# Altium PCB EE579_Skittles_pcb.PcbDoc
Units mm, origin at the board's own origin, x right, y up, seen from the top; angles counter-clockwise.
Board outline 58 x 50 mm, 2 copper layers (Top Layer, Bottom Layer), stack 1.57 mm thick; 33 components, 33 nets, 117 pads, 56 vias.
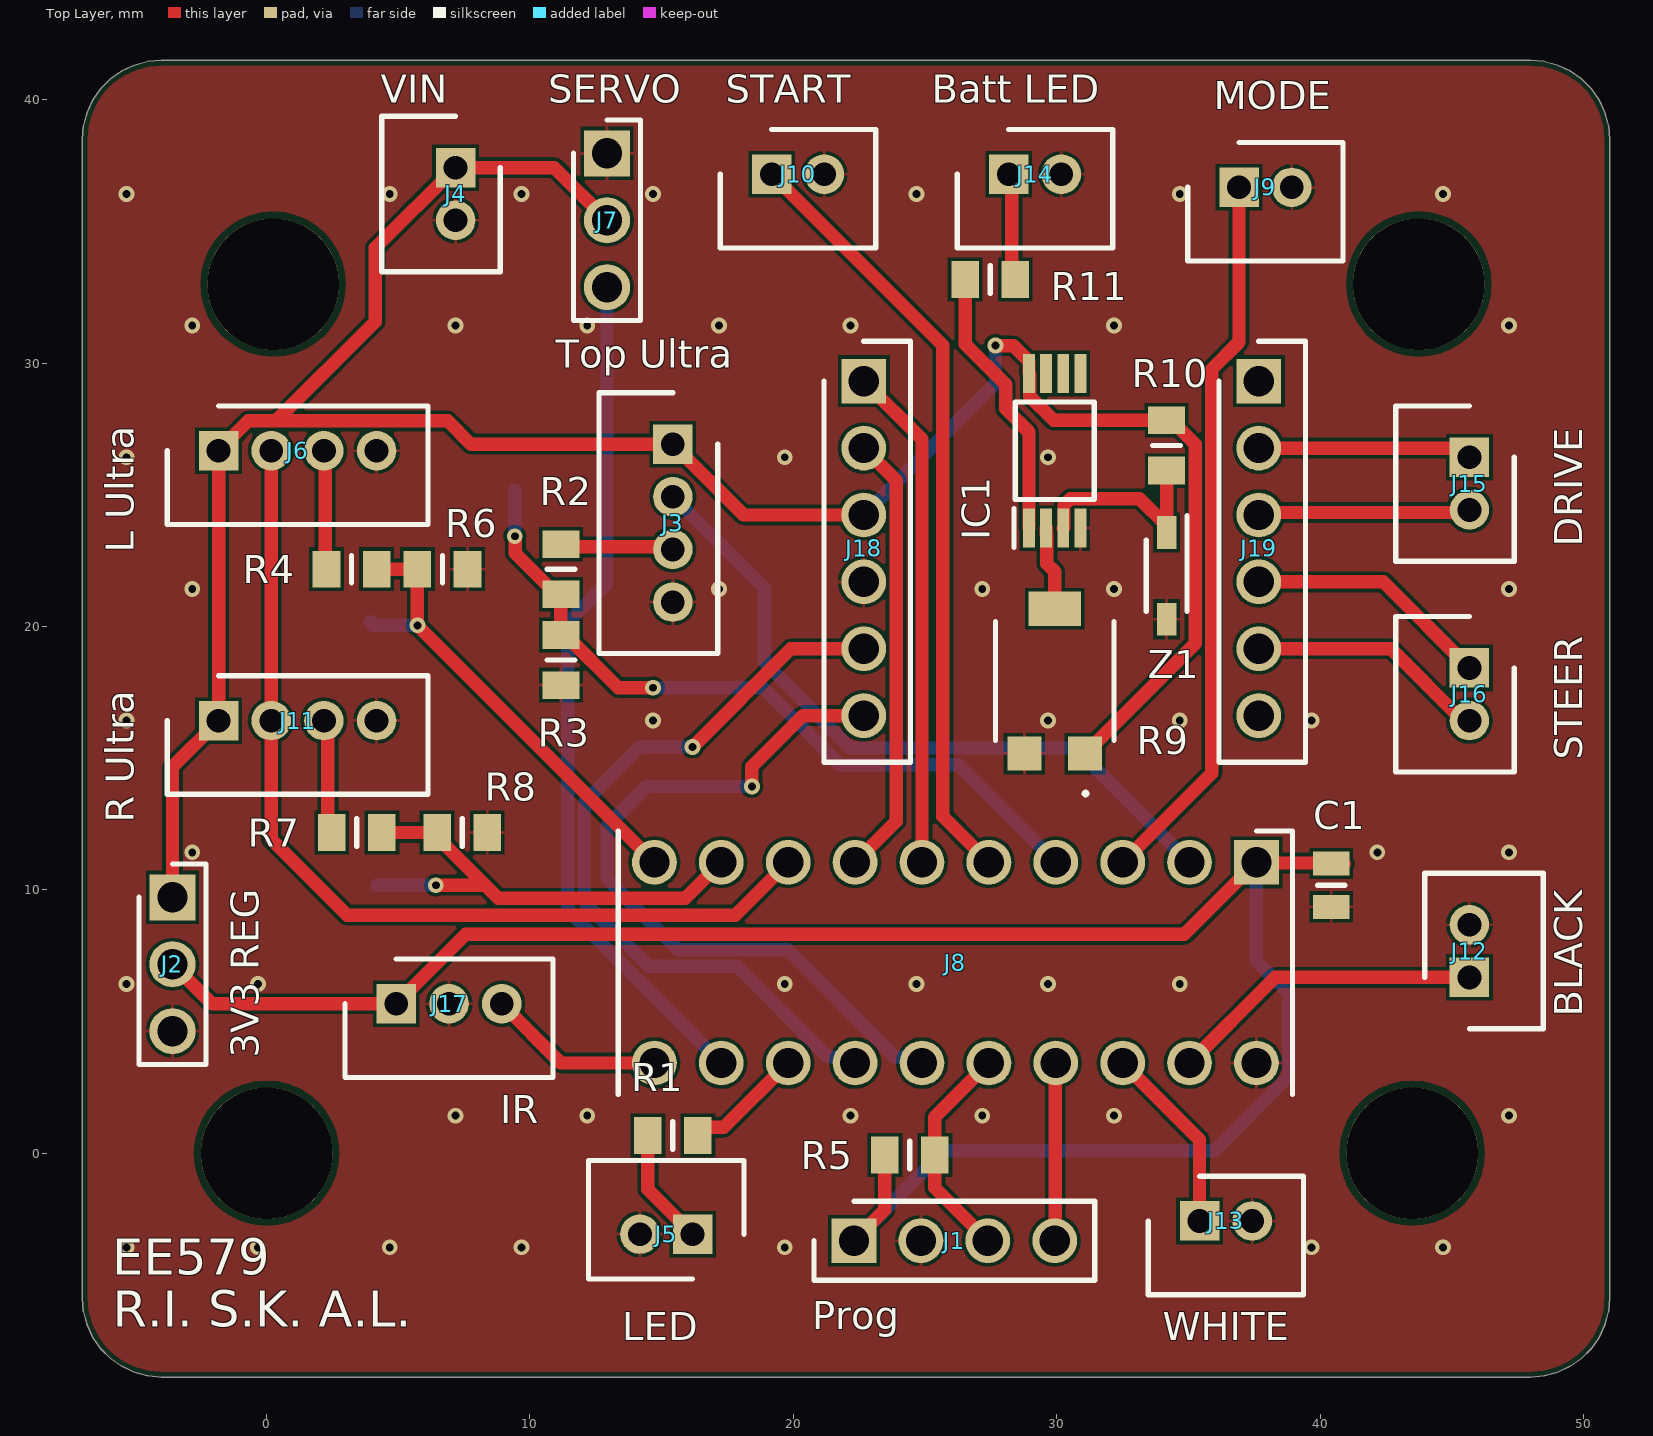
[diagram p0: Top Layer view]
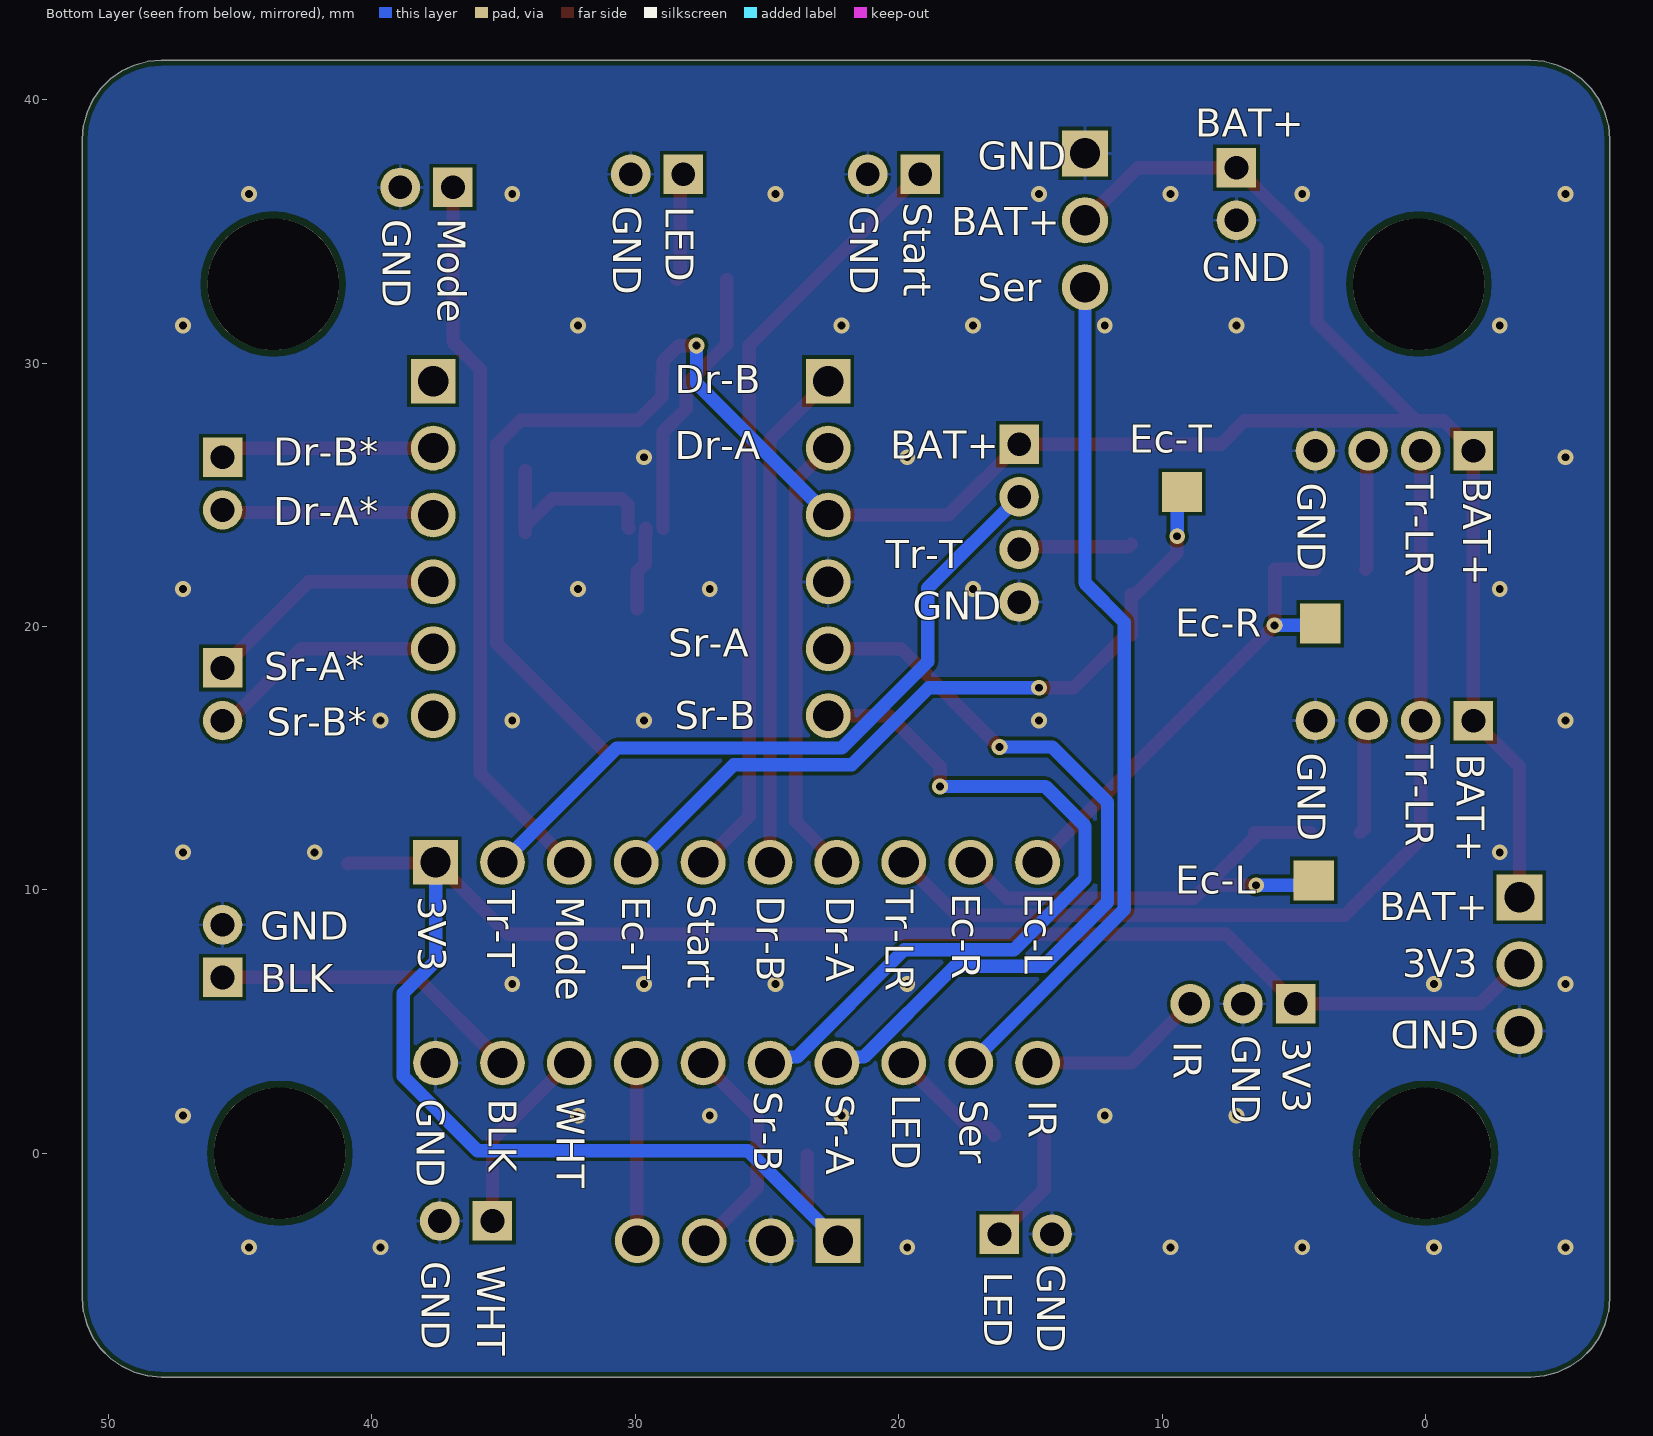
[diagram p1: Bottom Layer view, seen from below]
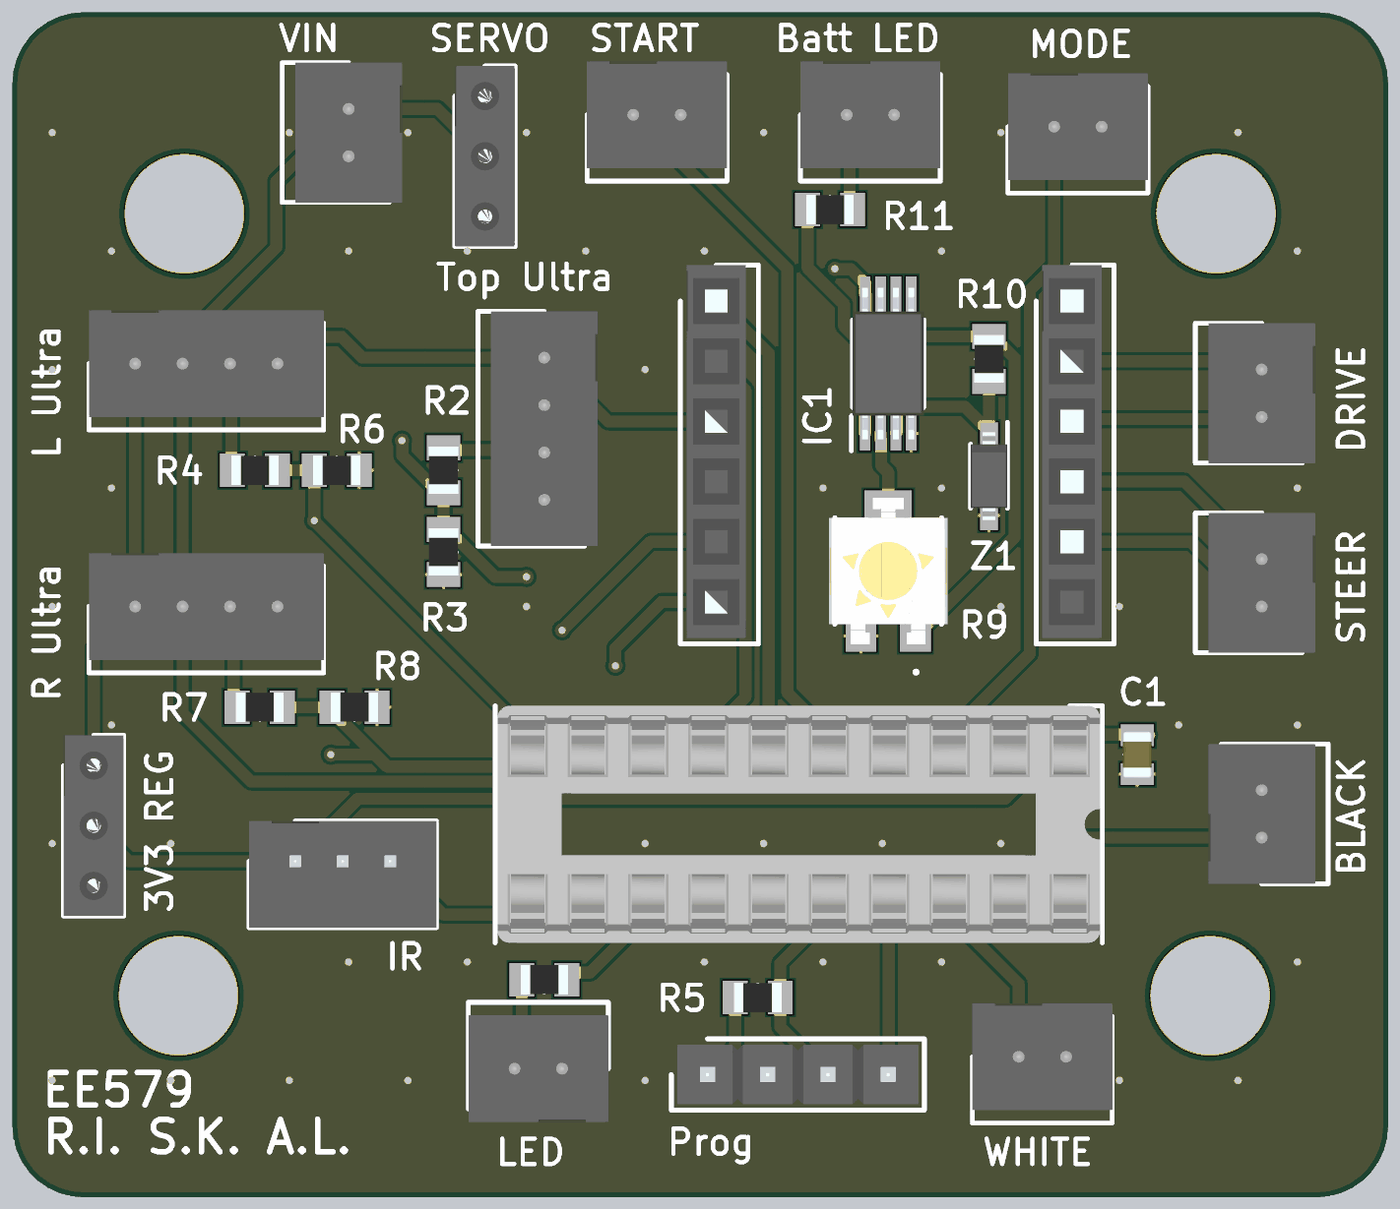
[diagram p2: 3D render of the assembled board from above, using the file's embedded part models]

## Layer stack, top to bottom
Top Solder: solder mask 0.0127, Solder Resist, Dk 3.8
Top Layer: signal copper 0.035
Dielectric: core 1.5, FR-4, Dk 4.5
Bottom Layer: signal copper 0.035
Bottom Solder: solder mask 0.0127, Solder Resist, Dk 3.8

## Board outline
48,-8.501 48.521,-8.455 49.026,-8.32 49.5,-8.099 49.928,-7.799 50.298,-7.429 50.598,-7.001 50.819,-6.527 50.954,-6.022 51,-5.501 51,38.499 50.954,39.02 50.819,39.525 50.598,39.999 50.298,40.427 49.928,40.797 49.5,41.097 49.026,41.318 48.521,41.453 48,41.499 -4,41.499 -4.521,41.453 -5.026,41.318 -5.5,41.097 -5.928,40.797 -6.298,40.427 -6.598,39.999 -6.819,39.525 -6.954,39.02 -7,38.499 -7,-5.501 -6.954,-6.022 -6.819,-6.527 -6.598,-7.001 -6.298,-7.429 -5.928,-7.799 -5.5,-8.099 -5.026,-8.32 -4.521,-8.455 -4,-8.501

## Design rules (kind name [scope] priority, off if disabled: settings)
BoardOutlineClearance [All] p1: gap=0.2 ignorepadtopadclearanceinfootprint=FALSE
Clearance [All] p1: gap=0.127 ignorepadtopadclearanceinfootprint=FALSE except(0.25: Arc-Hole Track-Hole SMDPad-Hole THPad-Hole Via-Hole Fill-Hole Poly-Hole Region-Hole Text-Hole)
ComponentClearance [All] p1: gap=0.127 collisioncheckmode=3 verticalgap=0.127 showdistances=TRUE
DiffPairsRouting [All] p1: maxlimit=0.254 minlimit=0.127 mostfreqgap=0.127 toplayer_minwidth=0.127 toplayer_maxwidth=25.4 toplayer_prefwidth=0.127 bottomlayer_minwidth=0.127 bottomlayer_maxwidth=25.4 bottomlayer_prefwidth=0.127 maxuncoupledlength=12.7
Height [All] p1: minheight=0 maxheight=1816.048 prefheight=12.7
HoleSize [All] p1: absolutevalues=TRUE maxlimit=6.3 minlimit=0.3 maxpercent=80.000 minpercent=20.000
HoleToHoleClearance [All] p1: gap=0.25 allowstackedmicrovias=FALSE
MinimumAnnularRing [All] p1: minimumring=0.076
MinimumSolderMaskSliver [All] p1: minsoldermaskwidth=0
PlaneClearance [All] p1: clearance=0.127
PlaneConnect PlaneConnectPowerPads [InPadClass('PowerPads')] p1: planeconnectstyle=Direct reliefexpansion=0.508 reliefentries=4 reliefconductorwidth=0.254 reliefairgap=0.254
PlaneConnect [All] p2: pad.planeconnectstyle=Relief pad.reliefexpansion=0.3 pad.reliefentries=4 pad.reliefconductorwidth=0.127 pad.reliefairgap=0.127 via.planeconnectstyle=Direct via.reliefexpansion=0.3 via.reliefentries=4 via.reliefconductorwidth=0.127 via.reliefairgap=0.127
PolygonConnect PolygonConnectPowerPads [All vs (InPadClass('PowerPads'))] p1: connectstyle=Direct reliefconductorwidth=0.254 reliefentries=4 polygonreliefangle="90 Angle" airgapwidth=0.254
PolygonConnect [All] p2: thpad.connectstyle=Relief thpad.reliefconductorwidth=0.127 thpad.reliefentries=4 thpad.polygonreliefangle="90 Angle" thpad.airgapwidth=0.127 smdpad.connectstyle=Relief smdpad.reliefconductorwidth=0.127 smdpad.reliefentries=4 smdpad.polygonreliefangle="90 Angle" smdpad.airgapwidth=0.127 via.connectstyle=Direct via.reliefconductorwidth=0.127 via.reliefentries=4 via.polygonreliefangle="90 Angle" via.airgapwidth=0.127
RoutingVias [All] p1: holewidth=0.3 width=0.6 viastyle="Through Hole" minholewidth=0.3 minwidth=0.6 maxholewidth=0.6 maxwidth=6.6
SilkToSilkClearance [All] p1: silktosilkclearance=0
SilkToSolderMaskClearance [IsPad] p1: minsilkscreentomaskgap=0.127 clearancetoexposedcopper=TRUE
SolderMaskExpansion [All] p1: expansion=0.075 istentingtop=FALSE
Width [All] p1: maxlimit=25.4 minlimit=0.127 preferedwidth=0.127 minimp=50.000000 maximp=50.000000 favimp=50.000000
20 further rules are at their usual default settings.

## Components (designator, comment, footprint, x,y, rotation, side; value= is the part's Value field where it differs from the comment)
C1 "21A106KQFNNNG" CAPC2012X135N 40.425,10.174 r90 top
IC1 "TS952IPT" SOP65P640X120-8N 29.925,26.674 r90 top
J1 "Prog" HDRV4W64P0X254_1X4_1016X250X901P 22.305,-3.326 r0 top
J2 "3V3 REG" RHDR3W60P0X254_1X3_762X254X700P -3.575,9.714 r270 top
J3 "Top Ultra" SHDR4W50P0X200_1X4_990X450X600P 15.425,26.924 r90 top
J4 "VIN" SHDR2W50P0X200_1X2_590X450X600P 7.175,37.424 r90 top
J5 "LED" SHDR2W50P0X200_1X2_590X450X600P 16.175,-3.076 r0 top
J6 "L Ultra" SHDR4W50P0X200_1X4_990X450X600P -1.825,26.674 r180 top
J7 "SERVO" RHDR3W60P0X254_1X3_762X254X700P 12.925,37.964 r270 top
J8 "MSP430G2553 IC Socket" DIPS762W70P254L2540H510Q20N 37.585,11.044 r270 top
J9 "START" SHDR2W50P0X200_1X2_590X450X600P 36.925,36.674 r180 top
J10 "MODE" SHDR2W50P0X200_1X2_590X450X600P 19.175,37.174 r180 top
J11 "R Ultra" SHDR4W50P0X200_1X4_990X450X600P -1.825,16.424 r180 top
J12 "BLACK" SHDR2W50P0X200_1X2_590X450X600P 45.675,6.674 r270 top
J13 "WHITE" SHDR2W50P0X200_1X2_590X450X600P 35.425,-2.576 r180 top
J14 "Batt LED" SHDR2W50P0X200_1X2_590X450X600P 28.175,37.174 r180 top
J15 "DRIVE" SHDR2W50P0X200_1X2_590X450X600P 45.675,26.424 r90 top
J16 "STEER" SHDR2W50P0X200_1X2_590X450X600P 45.675,18.424 r90 top
J17 "IR" SHDR3W50P0X200_1X3_790X450X600P 4.925,5.674 r180 top
J18 "61300611821" RHDR6W97P0X254_1X6_1574X250X865P 22.675,29.314 r270 top
J19 "61300611821" RHDR6W97P0X254_1X6_1574X250X865P 37.675,29.314 r270 top
R1 "ERJ-PB6B3002V" RESC2012X70N 15.425,0.674 r180 top
R2 "ERJ-PB6B3002V" RESC2012X70N 11.175,22.174 r90 top
R3 "ERJ-PB6B3002V" RESC2012X70N 11.175,18.724 r90 top
R4 "ERJ-PB6B3002V" RESC2012X70N 3.225,22.174 r180 top
R5 "ERJ-PB6B3002V" RESC2012X70N 24.425,-0.076 r180 top
R6 "ERJ-PB6B3002V" RESC2012X70N 6.675,22.174 r180 top
R7 "ERJ-PB6B3002V" RESC2012X70N 3.425,12.174 r180 top
R8 "ERJ-PB6B3002V" RESC2012X70N 7.425,12.174 r180 top
R9 "3314G-1-103E" 3314G-1-102E 29.925,17.924 r180 top
R10 "ERJ-PB6B3002V" RESC2012X70N 34.175,26.874 r270 top
R11 "ERJ-PB6B3002V" RESC2012X70N 27.475,33.174 r0 top
Z1 "BZT52C4V7-E3-08" SOD3716X135N 34.175,21.924 r270 top

## Footprints (in the part's own frame and the unit in brackets; to place one, negate y for a bottom-side part, rotate by r counter-clockwise, add the part's x,y. Pads: shape width x height; smd on the part's side, far side on the other; paste and mask are expansions set on the pad)
3314G-1-102E [mm]
  rect 1.3x1.3 smd: 1(-1.15,2.75) 3(1.15,2.75)
  rect 2x1.3 smd: 2(0,-2.75)
  silkscreen extent -2.25,-2.25 2.25,4.31, body extent -2.5,-3.1 2.5,3.1, height 2.73
CAPC2012X135N [mm]
  rect 0.91x1.39 smd: 1(-0.82,0) 2(0.82,0)
  silkscreen extent 0,-0.53 0,0.53, body extent -1,-0.63 1,0.63, height 1.35
DIPS762W70P254L2540H510Q20N [mm]
  rect 1.7x1.7 hole 1.15: 1(0,0)
  round 1.7 hole 1.15: 2(0,-2.54) 3(0,-5.08) 4(0,-7.62) 5(0,-10.16) 6(0,-12.7) 7(0,-15.24) 8(0,-17.78) 9(0,-20.32) 10(0,-22.86) 11(7.62,-22.86) 12(7.62,-20.32) 13(7.62,-17.78) 14(7.62,-15.24) 15(7.62,-12.7) 16(7.62,-10.16) 17(7.62,-7.62) 18(7.62,-5.08) 19(7.62,-2.54) 20(7.62,0)
  silkscreen extent -1.19,-24.23 8.81,1.37, body extent -1.19,-24.13 8.81,1.27, height 5
HDRV4W64P0X254_1X4_1016X250X901P [mm]
  rect 1.7x1.7 hole 1.15: 1(0,0)
  round 1.7 hole 1.15: 2(2.54,0) 3(5.08,0) 4(7.62,0)
  silkscreen extent -1.52,-1.5 9.14,1.5, body extent -1.27,-1.25 8.89,1.25, height 9.01
RESC2012X70N [mm]
  rect 1.05x1.4 smd: 1(-0.95,0) 2(0.95,0)
  silkscreen extent 0,-0.53 0,0.53, body extent -1,-0.63 1,0.63, height 0.7
RHDR3W60P0X254_1X3_762X254X700P [mm]
  rect 1.75x1.75 hole 1.15: 1(0,0)
  round 1.75 hole 1.15: 2(2.54,0) 3(5.08,0)
  silkscreen extent -1.27,-1.27 6.35,1.27, body extent -1.27,-1.27 6.35,1.27, height 7
RHDR6W97P0X254_1X6_1574X250X865P [mm]
  rect 1.7x1.7 hole 1.15: 1(0,0)
  round 1.7 hole 1.15: 2(2.54,0) 3(5.08,0) 4(7.62,0) 5(10.16,0) 6(12.7,0)
  silkscreen extent -1.52,-1.51 14.47,1.78, body extent -1.52,-1.25 14.22,1.25, height 8.65
SHDR2W50P0X200_1X2_590X450X600P [mm]
  rect 1.5x1.5 hole 0.9: 1(0,0)
  round 1.5 hole 0.9: 2(-2,0)
  silkscreen extent -3.95,-1.7 1.95,2.8, body extent -3.95,-2.25 1.95,2.25, height 6
SHDR3W50P0X200_1X3_790X450X600P [mm]
  rect 1.5x1.5 hole 0.9: 1(0,0)
  round 1.5 hole 0.9: 2(-2,0) 3(-4,0)
  silkscreen extent -5.95,-1.7 1.95,2.8, body extent -5.95,-1.7 1.95,2.8, height 6
SHDR4W50P0X200_1X4_990X450X600P [mm]
  rect 1.5x1.5 hole 0.9: 1(0,0)
  round 1.5 hole 0.9: 2(-2,0) 3(-4,0) 4(-6,0)
  silkscreen extent -7.95,-1.7 1.95,2.8, body extent -7.95,-2.25 1.95,2.25, height 6
SOD3716X135N [mm]
  rect 1.25x0.75 smd: 1(-1.65,0) 2(1.65,0)
  silkscreen extent -2.27,-0.77 1.35,0.77, body extent -1.85,-0.77 1.85,0.77, height 1.35
SOP65P640X120-8N [mm]
  rect 1.475x0.45 smd: 1(-2.938,0.975) 2(-2.938,0.325) 3(-2.938,-0.325) 4(-2.938,-0.975) 5(2.938,-0.975) 6(2.938,-0.325) 7(2.938,0.325) 8(2.938,0.975)
  silkscreen extent -3.67,-1.5 1.85,1.55, body extent -3.2,-1.5 3.2,1.5, height 1.2

## Part data
C1: library part CL21A106KQFNNNG, "Capacitor", Manufacturer_Name=SAMSUNG, Mouser Part Number=187-CL21A106KQFNNNG, Arrow Part Number=CL21A106KQFNNNG, Arrow Price/Stock=https://www.arrow.com/en/products/cl21a106kqfnnng/samsung-electro-mechanics?region=nac, Datasheet Link=https://octopart.com/cl21a106kpfnnne-samsung-9301557?gclid=EAIaIQobChMIppmoo53d5wIV14XVCh0LRA8uEAAYAiAAEgJJyPD_BwE, Height=1.35mm, Manufacturer_Part_Number=CL21A106KQFNNNG, Mouser Price/Stock=https://www.mouser.co.uk/ProductDetail/Samsung-Electro-Mechanics/CL21A106KQFNNNG?qs=hqM3L16%252Bxle4yU%252BqidqWig%3D%3D
IC1: "Integrated Circuit", Manufacturer_Name=STMicroelectronics, Mouser Part Number=511-TS952IP, Arrow Part Number=TS952IPT, Arrow Price/Stock=https://www.arrow.com/en/products/ts952ipt/stmicroelectronics, Datasheet Link=https://4donline.ihs.com/images/VipMasterIC/IC/SGST/SGST-S-A0000954157/SGST-S-A0000803870-1.pdf?hkey=52A5661711E402568146F3353EA87419, Height=1.2mm, Manufacturer_Part_Number=TS952IPT, Mouser Price/Stock=https://www.mouser.co.uk/ProductDetail/STMicroelectronics/TS952IPT?qs=FhojHmVgQovQNpIMuhf0yA%3D%3D
J1: library part PH1-04-UA, "Connector", Manufacturer_Name="Adam Tech", Mouser Part Number=737-PH1-04-UA, Arrow Part Number=PH1-04-UA, Arrow Price/Stock=https://www.arrow.com/en/products/ph1-04-ua/adam-tech?region=nac, Datasheet Link=https://datasheet.datasheetarchive.com/originals/distributors/Datasheets_SAMA/22522227e000bb8d8f26a3580c1bb98b.pdf, Height=9.008mm, Manufacturer_Part_Number=PH1-04-UA, Mouser Price/Stock=https://www.mouser.co.uk/ProductDetail/Adam-Tech/PH1-04-UA?qs=HoCaDK9Nz5fnp3pp8iwrSQ%3D%3D
J2 J7: library part 801-87-003-10-001101, "Connector", Manufacturer_Name=Preci-Dip, Mouser Part Number=437-8018700310001101, Arrow Part Number=801-87-003-10-001101, Arrow Price/Stock=https://www.arrow.com/en/products/801-87-003-10-001101/preci-dip-sa, Datasheet Link=http://www.precidip.com/en/Products/PCB-Connectors/pview/801-PP-NNN-10-001101.html, Height=7mm, Manufacturer_Part_Number=801-87-003-10-001101, Mouser Price/Stock=https://www.mouser.co.uk/ProductDetail/Preci-dip/801-87-003-10-001101?qs=FtMuP6KVi2T66jAxB5rZkg%3D%3D
J3 J6 J11: library part B4B-PH-K-S_LF__SN_, "Connector", Arrow Part Number=B4B-PH-K-S(LF)(SN), Manufacturer_Name="JST (JAPAN SOLDERLESS TERMINALS)", Arrow Price/Stock=https://www.arrow.com/en/products/b4b-ph-k-s-lf-sn/jst-manufacturing?region=europe, Datasheet Link=https://datasheet.lcsc.com/szlcsc/JST-Sales-America-B4B-PH-K-S-LF-SN_C131334.pdf, Height=6mm, Manufacturer_Part_Number=B4B-PH-K-S(LF)(SN)
J4 J5 J9 J10 J12 J13 J14 J15 J16: library part B2B-PH-K-S_LF__SN_, "Connector", Arrow Part Number=B2B-PH-K-S(LF)(SN), Manufacturer_Name="JST (JAPAN SOLDERLESS TERMINALS)", Arrow Price/Stock=https://www.arrow.com/en/products/b2b-ph-k-s-lf-sn/jst-manufacturing?region=europe, Datasheet Link=https://datasheet.lcsc.com/szlcsc/JST-Sales-America-B2B-PH-K-S-LF-SN_C131337.pdf, Height=6mm, Manufacturer_Part_Number=B2B-PH-K-S(LF)(SN)
J8: library part 1-2199298-6, "Connector", Manufacturer_Name="TE Connectivity", Mouser Part Number=571-1-2199298-6, Arrow Part Number=1-2199298-6, Arrow Price/Stock=https://www.arrow.com/en/products/1-2199298-6/te-connectivity?region=europe, Datasheet Link=https://www.te.com/commerce/DocumentDelivery/DDEController?Action=showdoc&DocId=Customer+Drawing%7F2199298%7FA%7Fpdf%7FEnglish%7FENG_CD_2199298_A_baseFilename.pdf%7F1-2199298-6, Height=5.1mm, Manufacturer_Part_Number=1-2199298-6, Mouser Price/Stock=https://www.mouser.co.uk/ProductDetail/TE-Connectivity/1-2199298-6?qs=fK8dlpkaUMvuMXpJTs4GlA%3D%3D
J17: library part B3B-PH-K-S_LF__SN_, "Connector", Arrow Part Number=B3B-PH-K-S(LF)(SN), Manufacturer_Name="JST (JAPAN SOLDERLESS TERMINALS)", Arrow Price/Stock=https://www.arrow.com/en/products/b3b-ph-k-s-lf-sn/jst-manufacturing?region=europe, Datasheet Link=http://www.jst-mfg.com/product/pdf/eng/ePH.pdf, Height=6mm, Manufacturer_Part_Number=B3B-PH-K-S(LF)(SN)
J18 J19: "Connector", Manufacturer_Name="Wurth Elektronik", Mouser Part Number=710-61300611821, Datasheet Link=https://www.we-online.de/katalog/datasheet/61300611821.pdf, Height=8.65mm, Manufacturer_Part_Number=61300611821, Mouser Price/Stock=https://www.mouser.co.uk/ProductDetail/Wurth-Elektronik/61300611821?qs=iLbezkQI%252BsgS21jF2eozhA%3D%3D
R1 R2 R3 R4 R5 R6 R7 R8 R10 R11: "Resistor", Manufacturer_Name=Panasonic, Mouser Part Number=667-ERJ-PB6B3002V, Arrow Part Number=ERJ-PB6B3002V, Arrow Price/Stock=https://www.arrow.com/en/products/erj-pb6b3002v/panasonic?region=nac, Datasheet Link=https://componentsearchengine.com/Datasheets/1/ERJ-PB6B3002V.pdf, Height=0.7mm, Manufacturer_Part_Number=ERJ-PB6B3002V, Mouser Price/Stock=https://www.mouser.co.uk/ProductDetail/Panasonic/ERJ-PB6B3002V?qs=eFOtW6xYNWHxFAxx7HWdpg%3D%3D
R9: "Resistor", Manufacturer_Name=Bourns, Mouser Part Number=652-3314G-1-103E, Arrow Part Number=3314G-1-103E, Arrow Price/Stock=https://www.arrow.com/en/products/3314g-1-103e/bourns?region=europe, Datasheet Link=https://componentsearchengine.com/Datasheets/2/3314G-1-103E.pdf, Manufacturer_Part_Number=3314G-1-103E, Mouser Price/Stock=https://www.mouser.co.uk/ProductDetail/Bourns/3314G-1-103E?qs=5DXzRwmrLHHE6mxfh4g4uw%3D%3D
Z1: "Zener Diode", Manufacturer_Name=Vishay, Mouser Part Number=78-BZT52C4V7-E3-08, Arrow Part Number=BZT52C4V7-E3-08, Arrow Price/Stock=https://www.arrow.com/en/products/bzt52c4v7-e3-08/vishay, Datasheet Link=https://www.arrow.com/en/products/bzt52c4v7-e3-08/vishay, Height=1.35mm, Manufacturer_Part_Number=BZT52C4V7-E3-08, Mouser Price/Stock=https://www.mouser.co.uk/ProductDetail/Vishay-Semiconductors/BZT52C4V7-E3-08?qs=KP8Io%2FXyE5QGkCdlrdvYmA%3D%3D

## Free pads (board coordinates)
  round 5 hole 5: 1(0,0) 1(0.25,32.999) 1(43.5,0) 1(43.75,32.999)
  rect 1.524x1.524 smd far side: 3(3.99,20.109) 3(4.24,10.359) 3(9.24,25.109)

## Via types
v1: diameter 0.6, hole 0.3, Top Layer to Bottom Layer, tented both sides, 56 vias

## Nets (pads, with @x,y where several pads share a name; then routed paths per layer and width w, separated by ;. In a path a pad name is that pad's centre, name@x,y a point inside that pad or via, vN(x,y) a via of type N, cw(c..) or ccw(c..) an arc to the next point about the centre after c; other vN are vias at no path point)
+3.3: C1.2 J1.1 J2.2 J8.1 J17.1 R5.2 | length 78.8
  Top Layer w0.508: J2.2 -2.075,5.674 J17.1 7.56,8.309 34.85,8.309 J8.1 37.61,11.019 40.9,11.019 C1.2@40.925,10.994 ; J1.1 23.475,-2.156 R5.2
  Bottom Layer w0.508: J1.1 25.723,0.092 35.994,0.092 38.816,2.914 38.816,6.066 37.585,7.297 J8.1
BlackBtn: J8.19 J12.1 | length 11.2
  Top Layer w0.508: J8.19 38.295,6.674 J12.1@44.925,6.674
DriveMotor_A: J8.7 J18.2 | length 16.9
  Top Layer w0.508: J8.7 23.906,12.605 23.906,25.543 J18.2
DriveMotor_B: J8.6 J18.1 | length 19.2
  Top Layer w0.508: J18.1 24.885,27.104 J8.6
GND: C1.1 IC1.4 J1.2 J2.3 J3.4 J4.2 J5.2 J6.4 J7.1 J8.20 J9.2 J10.2 J11.4 J12.2 J13.2 J14.2 J17.2 J18.4 R3.1 R6.1 R8.1 R9.3 Z1.2
  other v1: -5.325,-3.576 -0.325,-3.576 4.675,-3.576 9.675,-3.576 19.675,-3.576 39.675,-3.576 44.675,-3.576 7.175,1.424 12.175,1.424 22.175,1.424 27.175,1.424 32.175,1.424 47.175,1.424 -5.325,6.424 -0.325,6.424 19.675,6.424 24.675,6.424 29.675,6.424 34.675,6.424 -2.825,11.424 42.175,11.424 47.175,11.424 -5.325,16.424 14.675,16.424 29.675,16.424 34.675,16.424 39.675,16.424 -2.825,21.424 17.175,21.424 27.175,21.424 32.175,21.424 47.175,21.424 -5.325,26.424 19.675,26.424 29.675,26.424 -2.825,31.424 7.175,31.424 12.175,31.424 17.175,31.424 22.175,31.424 32.175,31.424 47.175,31.424 -5.325,36.424 4.675,36.424 9.675,36.424 14.675,36.424 24.675,36.424 34.675,36.424 44.675,36.424
Indicator: J8.13 R1.1 | length 4.6
  Top Layer w0.508: R1.1 16.375,0.706 16.646,0.977 17.358,0.977 J8.13
IR: J8.11 J17.3 | length 6.7
  Top Layer w0.508: J17.3 11.175,3.424 J8.11
L_UltraEcho: J8.10 pad.3@3.99,20.109 R4.1 R6.2 | length 18.3
  Top Layer w0.508: R4.1 R6.2 v1(5.725,20.044) J8.10
  Bottom Layer w0.508: pad.3@3.925,20.174 4.055,20.044 v1(5.725,20.044)
LR_UltraTrig: J6.2 J8.8 J11.2 | length 36.4
  Top Layer w0.508: J6.2 J11.2 0.175,11.924 3.06,9.039 17.8,9.039 J8.8
ModeSwitch: J8.3 J9.1 | length 27.5
  Top Layer w0.508: J8.3 35.891,14.43 35.891,29.769 36.925,30.803 J9.1
NetIC1_1: IC1.1 R11.1 | length 10.4
  Top Layer w0.508: R11.1 26.525,30.722 28.06,29.187 28.06,28.272 28.95,27.382 IC1.1
NetIC1_2: IC1.2 R9.2 | length 3.2
  Top Layer w0.508: IC1.2 29.6,23.488 29.629,23.459 29.629,22.382 29.925,22.086 R9.2
NetIC1_3: IC1.3 R10.2 Z1.1 | length 7.7
  Top Layer w0.508: IC1.3 30.279,23.765 30.279,24.616 30.517,24.855 33.145,24.855 Z1.1@34.175,23.824 ; Z1.1 Z1.1@34.175,23.824 ; R10.2 Z1.1@34.175,23.824
NetJ3_3: J3.3 R2.2 | length 4.3
  Top Layer w0.508: R2.2 11.275,23.024 15.325,23.024 J3.3
NetJ5_1: J5.1 R1.2 | length 4.5
  Top Layer w0.508: R1.2 14.475,-1.376 J5.1
NetJ6_3: J6.3 R4.2 | length 4.5
  Top Layer w0.508: J6.3 2.225,26.624 2.225,22.224 R4.2
NetJ11_3: J11.3 R7.2 | length 4.4
  Top Layer w0.508: J11.3 2.325,16.274 2.325,12.324 R7.2
NetJ14_1: J14.1 R11.2 | length 4.1
  Top Layer w0.508: J14.1 28.3,37.049 28.3,33.299 R11.2
NetJ15_1: J15.1 J19.2 | length 8.1
  Top Layer w0.508: J19.2 45.325,26.774 J15.1
NetJ15_2: J15.2 J19.3 | length 8.1
  Top Layer w0.508: J19.3 37.77,24.329 45.58,24.329 J15.2
NetJ16_1: J16.1 J19.4 | length 9.4
  Top Layer w0.508: J19.4 42.405,21.694 J16.1
NetJ16_2: J16.2 J19.5 | length 9.1
  Top Layer w0.508: J19.5 42.695,19.154 45.425,16.424 J16.2
R_UltraEcho: J8.9 pad.3@4.24,10.359 R7.1 R8.2 | length 18.7
  Top Layer w0.508: R7.1 R8.2 6.475,11.999 8.238,10.237 ; v1(6.425,10.174) 8.175,10.174 8.238,10.237 ; J8.9 15.895,9.674 8.8,9.674 8.238,10.237
  Bottom Layer w0.508: pad.3@4.175,10.174 v1(6.425,10.174)
SBWTCK: J1.4 J8.17 | length 6.8
  Top Layer w0.508: J1.4 29.945,-3.306 29.945,3.404 J8.17
SBWTDIO: J1.3 J8.16 R5.1 | length 8.4
  Top Layer w0.508: J1.3 25.375,-1.316 R5.1 25.375,1.374 J8.16
Servo: J7.3 J8.12 | length 32.5
  Bottom Layer w0.508: J7.3 12.925,21.651 11.436,20.162 11.436,9.253 J8.12
StartBtn: J8.5 J10.1 | length 29.5
  Top Layer w0.508: J10.1 25.675,30.674 25.675,12.794 J8.5
SteerMotor_A: J8.14 J18.5 | length 29.6
  Top Layer w0.508: v1(16.175,15.424) 19.905,19.154 J18.5
  Bottom Layer w0.508: v1(16.175,15.424) 14.175,15.424 12.071,13.32 12.071,9.528 14.506,7.093 17.877,7.093 21.318,3.652 22.117,3.652 J8.14
SteerMotor_B: J8.15 J18.6 | length 28.8
  Top Layer w0.508: v1(18.425,13.924) 18.425,14.674 20.365,16.614 J18.6
  Bottom Layer w0.508: v1(18.425,13.924) 14.425,13.924 12.925,12.424 12.925,10.424 15.621,7.728 19.782,7.728 23.858,3.652 24.657,3.652 J8.15
Top_UltraEcho: J8.4 pad.3@9.24,25.109 R2.1 R3.2 | length 28.7
  Top Layer w0.508: v1(9.425,23.424) 9.443,23.406 9.443,22.781 11,21.224 R2.1 R3.2 11.35,19.674 13.35,17.674 v1(14.675,17.674)
  Bottom Layer w0.508: v1(9.425,23.424) pad.3@9.425,25.174 ; v1(14.675,17.674) 18.856,17.674 21.782,14.748 26.261,14.748 J8.4
Top_UltraTrig: J3.2 J8.2 | length 27
  Bottom Layer w0.508: J3.2 18.89,21.459 18.89,18.658 22.165,15.383 30.706,15.383 J8.2
VCC: IC1.8 J2.1 J3.1 J4.1 J6.1 J7.2 J11.1 J18.3 R9.1 R10.1 | length 95
  Top Layer w0.508: J2.1 -3.575,14.674 J11.1 J6.1 -0.694,27.805 0.356,27.805 ; J7.2 10.925,37.424 J4.1 4.125,34.374 4.125,31.574 0.356,27.805 ; J18.3 18.115,24.234 J3.1 7.758,26.924 6.877,27.805 0.356,27.805 ; v1(27.675,30.674) 27.693,30.656 28.36,30.656 28.95,30.067 IC1.8 28.979,29.583 28.979,28.732 29.887,27.824 R10.1 34.35,27.824 35.256,26.918 35.256,19.355 R9.1
  Bottom Layer w0.508: J18.3 27.675,29.234 v1(27.675,30.674)
WhiteBtn: J8.18 J13.1 | length 7.2
  Top Layer w0.508: J8.18 35.425,0.504 J13.1
pads on no net: IC1.5 IC1.6 IC1.7 J19.1 J19.6

## Polygon pours and split planes (outlines as drawn)
GND on Top Layer "TOP_GND" (solid, pour order 0): 48.001,-8.505 48.522,-8.459 49.027,-8.324 49.501,-8.103 49.929,-7.803 50.299,-7.433 50.599,-7.005 50.82,-6.531 50.955,-6.026 51.001,-5.505 51.001,38.495 50.955,39.016 50.82,39.521 50.599,39.995 50.299,40.423 49.929,40.793 49.501,41.093 49.027,41.314 48.522,41.449 48.001,41.495 -3.999,41.495 -4.52,41.449 -5.025,41.314 -5.499,41.093 -5.927,40.793 -6.297,40.423 -6.597,39.995 -6.818,39.521 -6.953,39.016 -6.999,38.495 -6.999,-5.505 -6.953,-6.026 -6.818,-6.531 -6.597,-7.005 -6.297,-7.433 -5.927,-7.803 -5.499,-8.103 -5.025,-8.324 -4.52,-8.459 -3.999,-8.505
GND on Bottom Layer "BOTTOM_GND" (solid, pour order 1): 48.001,-8.505 48.522,-8.459 49.027,-8.324 49.501,-8.103 49.929,-7.803 50.299,-7.433 50.599,-7.005 50.82,-6.531 50.955,-6.026 51.001,-5.505 51.001,38.495 50.955,39.016 50.82,39.521 50.599,39.995 50.299,40.423 49.929,40.793 49.501,41.093 49.027,41.314 48.522,41.449 48.001,41.495 -3.999,41.495 -4.52,41.449 -5.025,41.314 -5.499,41.093 -5.927,40.793 -6.297,40.423 -6.597,39.995 -6.818,39.521 -6.953,39.016 -6.999,38.495 -6.999,-5.505 -6.953,-6.026 -6.818,-6.531 -6.597,-7.005 -6.297,-7.433 -5.927,-7.803 -5.499,-8.103 -5.025,-8.324 -4.52,-8.459 -3.999,-8.505

## Silkscreen, mask and mechanical layers (free items; w line width, h text height)
Top Overlay:
  text "EE579" at -5.871,-4.621 h1.37
  text "R.I. S.K. A.L." at -5.846,-6.597 h1.37
Bottom Overlay:
  text "BAT+" at 8.747,38.602 h1.07
  text "GND" at 16.997,37.352 h1.07
  text "Start" at 19.816,36.084 h1.07 r90
  text "GND" at 21.844,35.958 h1.07 r90
  text "LED" at 28.844,35.958 h1.07 r90
  text "GND" at 30.844,35.958 h1.07 r90
  text "Mode" at 37.497,35.496 h1.07 r90
  text "GND" at 39.594,35.458 h1.07 r90
  text "BAT+" at 17.997,34.852 h1.07
  text "GND" at 8.497,33.102 h1.07
  text "Ser" at 16.997,32.352 h1.07
  text "Dr-B" at 28.497,28.852 h1.07
  text "Ec-T" at 11.247,26.602 h1.07
  text "BAT+" at 20.316,26.374 h1.07
  text "Dr-A" at 28.497,26.352 h1.07
  text "Dr-B*" at 43.747,26.102 h1.07
  text "Tr-LR" at 0.747,25.746 h1.07 r90
  text "BAT+" at -1.438,25.662 h1.07 r90
  text "GND" at 4.844,25.458 h1.07 r90
  text "Dr-A*" at 43.747,23.852 h1.07
  text "Tr-T" at 20.492,22.218 h1.07
  text "GND" at 19.459,20.255 h1.07
  text "Ec-R" at 9.497,19.602 h1.07
  text "Sr-A" at 28.747,18.852 h1.07
  text "Sr-A*" at 44.086,17.954 h1.07
  text "Sr-B" at 28.497,16.102 h1.07
  text "Sr-B*" at 43.997,15.852 h1.07
  text "Tr-LR" at 0.747,15.496 h1.07 r90
  text "GND" at 4.844,15.208 h1.07 r90
  text "BAT+" at -1.188,15.162 h1.07 r90
  text "Tr-LR" at 20.497,9.996 h1.07 r90
  text "Tr-T" at 35.631,9.991 h1.07 r90
  text "Ec-L" at 15.222,9.878 h1.07 r90
  text "Ec-R" at 17.972,9.878 h1.07 r90
  text "Ec-L" at 9.497,9.852 h1.07
  text "Start" at 28.014,9.811 h1.07 r90
  text "Dr-B" at 25.391,9.766 h1.07 r90
  text "Dr-A" at 22.747,9.746 h1.07 r90
  text "Ec-T" at 30.497,9.746 h1.07 r90
  text "Mode" at 32.997,9.746 h1.07 r90
  text "3V3" at 38.247,9.746 h1.07 r90
  text "BAT+" at 1.747,8.852 h1.07
  text "GND" at 44.247,8.102 h1.07
  text "3V3" at 0.876,6.676 h1.07
  text "BLK" at 44.247,6.102 h1.07
  text "GND" at -2.049,5.029 h1.07 r180
  text "GND" at 7.341,4.477 h1.07 r90
  text "3V3" at 5.423,4.375 h1.07 r90
  text "IR" at 9.561,4.257 h1.07 r90
  text "Sr-B" at 25.486,2.357 h1.07 r90
  text "LED" at 20.247,2.246 h1.07 r90
  text "Sr-A" at 22.747,2.246 h1.07 r90
  text "WHT" at 32.986,2.107 h1.07 r90
  text "BLK" at 35.558,2.066 h1.07 r90
  text "GND" at 38.308,2.066 h1.07 r90
  text "Ser" at 17.686,2.03 h1.07 r90
  text "IR" at 15.061,2.007 h1.07 r90
  text "GND" at 38.105,-4.096 h1.07 r90
  text "GND" at 14.733,-4.214 h1.07 r90
  text "WHT" at 35.997,-4.254 h1.07 r90
  text "LED" at 16.747,-4.504 h1.07 r90
Mechanical 1:
  the board outline again, w0